# EAGLE board Remote (EAGLE 5.11)
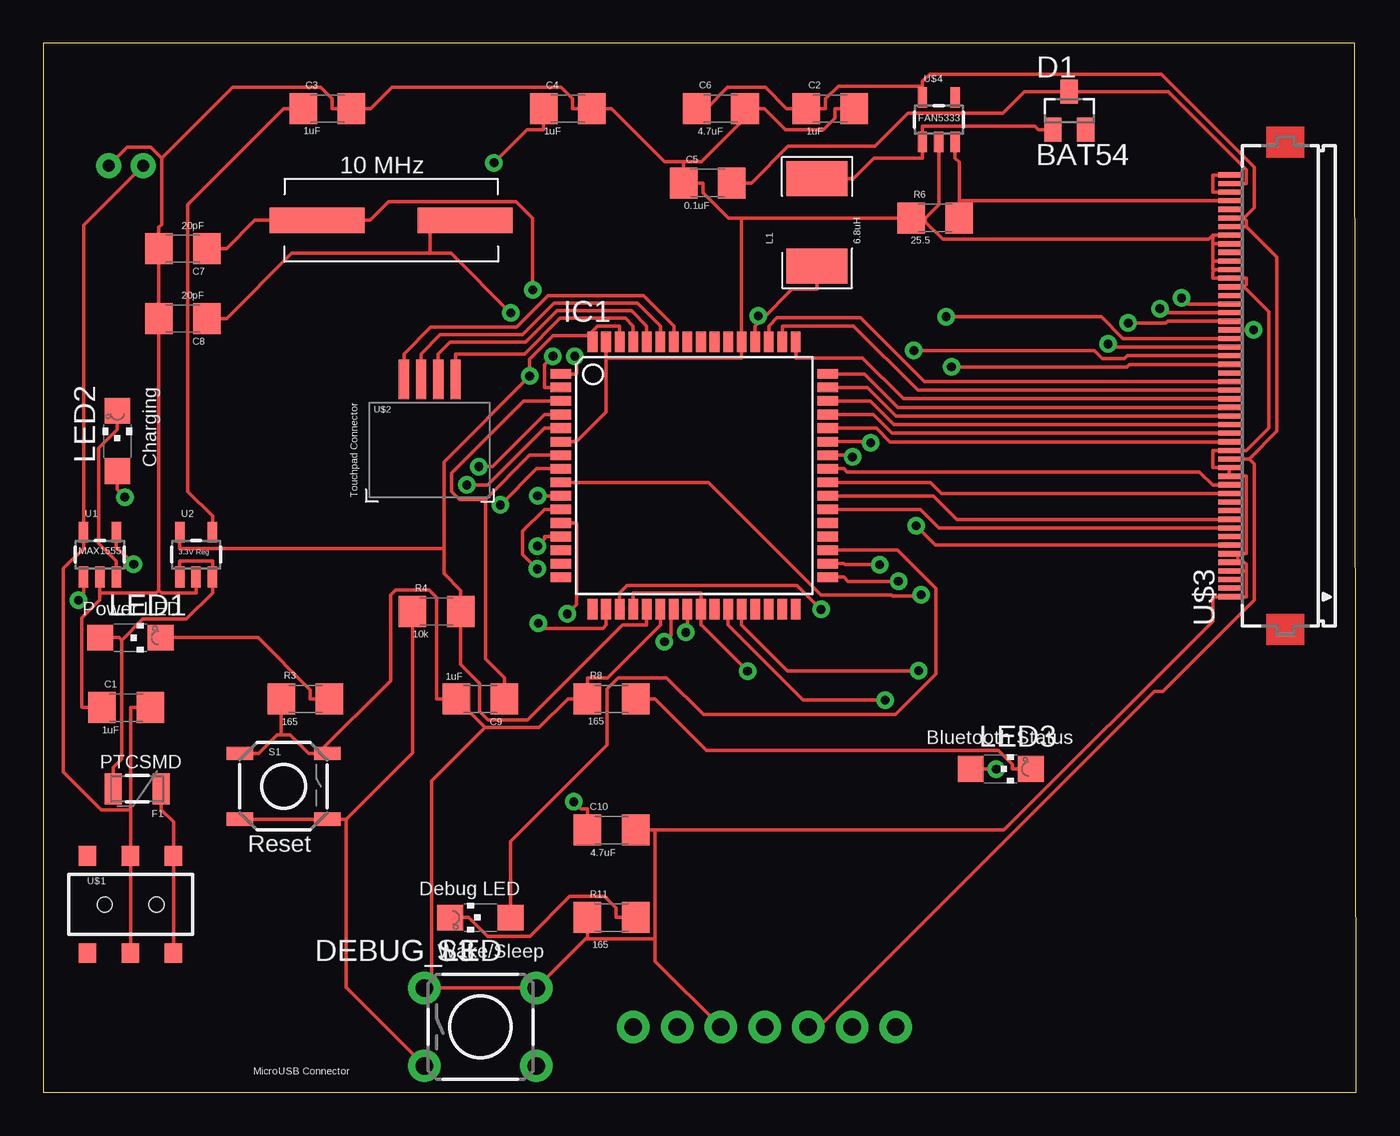
[diagram p0: board, top side]
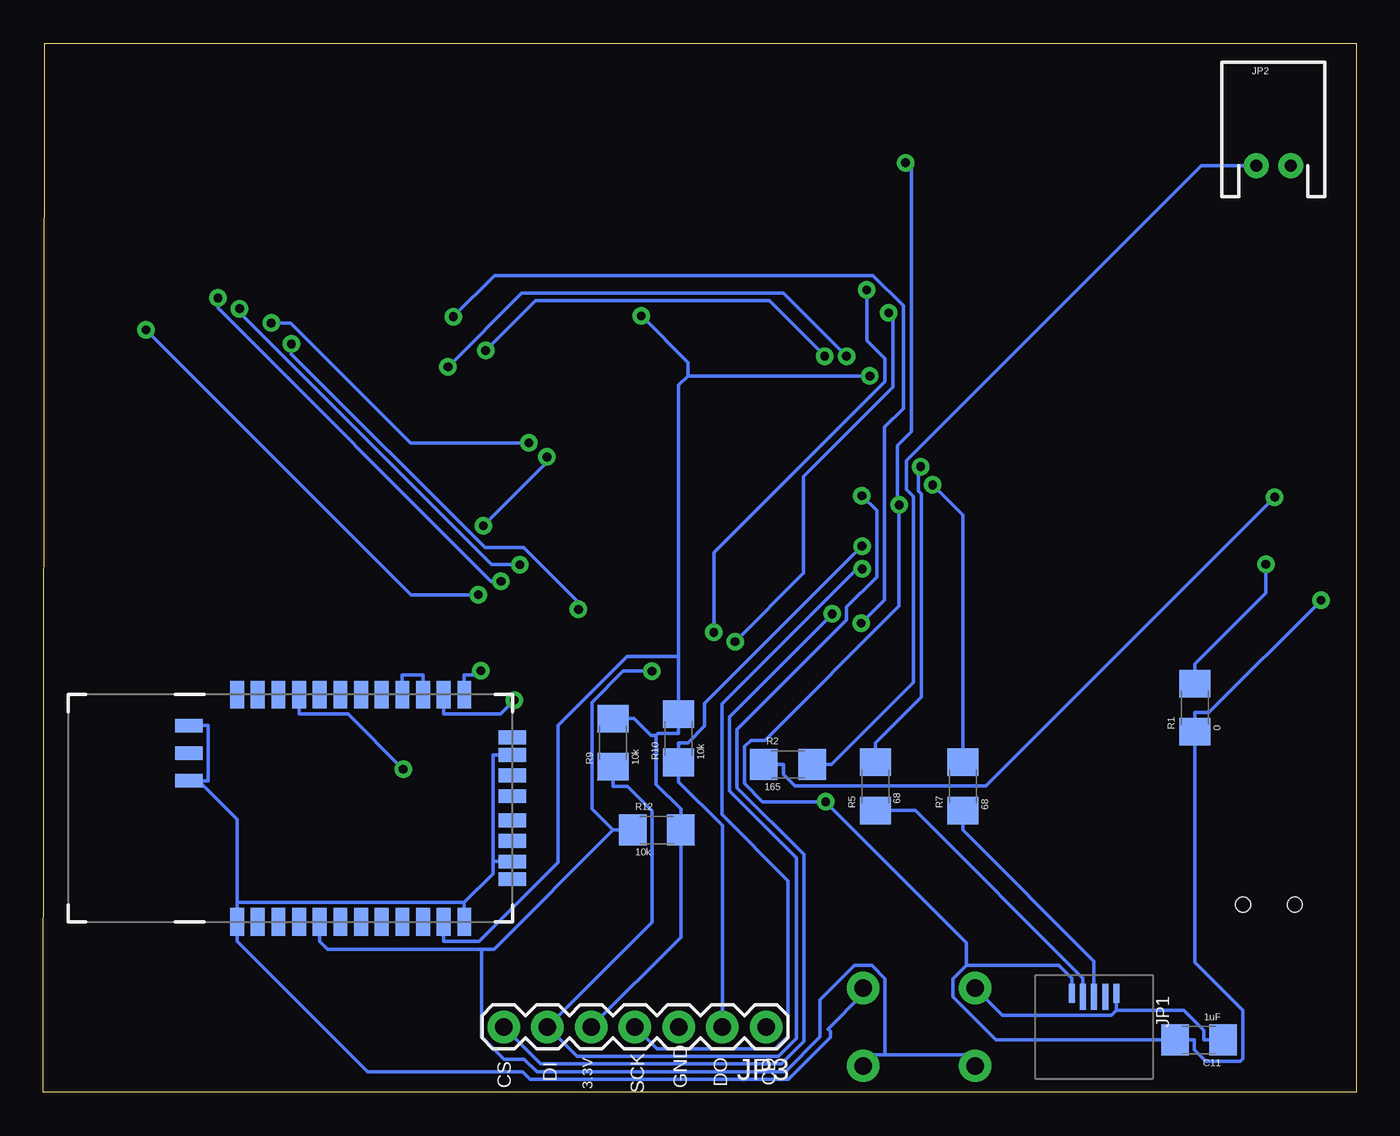
[diagram p1: board, bottom side, seen from below]

Size 76.29 x 60.96 mm. Coordinates in mm from the lower left corner, seen from the top.
Outline: 0,0 76.29,0 76.2,60.96 0,60.96 0,0
Copper layers (1*16): Top 0.035mm / dielectric 1.5mm / Bottom 0.035mm
Design rules "SparkFun": minimum track width 8mil, minimum drill 20mil, track to track 8mil, track to pad 8mil, pad to pad 8mil, via to via 8mil, smd to smd 8mil, copper to edge 10mil, drill to drill 8mil, minimum pad ring 12mil, minimum via ring 10mil, stop-mask expansion 4mil, vias tented up to drill 25mil, thermal gap 10mil

## Footprints (pad centres in the part's own frame; a part is rotated, then mirrored left to right if it is on the bottom)
1206 = smd 1.6 x 1.8: 1 -1.4,0; 2 1.4,0
SOT23 = smd 1 x 1.4: 1 -0.95,-1.1; 2 0.95,-1.1; 3 0,1.1
CHIPLED_1206 = smd 1.5 x 1.5: A 0,-1.75; C 0,1.75
PTC-1206 = smd 1 x 1.8: 1 -1.4,0; 2 1.4,0
TQFP64 = smd 1.194 x 0.559: 1 -7.76,5.905; 2 -7.76,5.118; 3 -7.76,4.331; 4 -7.76,3.543; 5 -7.76,2.756; 6 -7.76,1.968; 7 -7.76,1.181; 8 -7.76,0.394; 9 -7.76,-0.394; 10 -7.76,-1.181; 11 -7.76,-1.968; 12 -7.76,-2.756; 13 -7.76,-3.543; 14 -7.76,-4.331; 15 -7.76,-5.118; 16 -7.76,-5.905; 33 7.76,-5.905; 34 7.76,-5.118; 35 7.76,-4.331; 36 7.76,-3.543; 37 7.76,-2.756; 38 7.76,-1.968; 39 7.76,-1.181; 40 7.76,-0.394; 41 7.76,0.394; 42 7.76,1.181; 43 7.76,1.968; 44 7.76,2.756; 45 7.76,3.543; 46 7.76,4.331; 47 7.76,5.118; 48 7.76,5.905 | smd 0.559 x 1.194: 17 -5.905,-7.76; 18 -5.118,-7.76; 19 -4.331,-7.76; 20 -3.543,-7.76; 21 -2.756,-7.76; 22 -1.968,-7.76; 23 -1.181,-7.76; 24 -0.394,-7.76; 25 0.394,-7.76; 26 1.181,-7.76; 27 1.968,-7.76; 28 2.756,-7.76; 29 3.543,-7.76; 30 4.331,-7.76; 31 5.118,-7.76; 32 5.905,-7.76; 49 5.905,7.76; 50 5.118,7.76; 51 4.331,7.76; 52 3.543,7.76; 53 2.756,7.76; 54 1.968,7.76; 55 1.181,7.76; 56 0.394,7.76; 57 -0.394,7.76; 58 -1.181,7.76; 59 -1.968,7.76; 60 -2.756,7.76; 61 -3.543,7.76; 62 -4.331,7.76; 63 -5.118,7.76; 64 -5.905,7.76
MICRO-B-RA-SMT = smd 0.35 x 1.1: 1 1.3,-1.95; 5 -1.3,-1.95 | smd 0.35 x 1.5: 2 0.65,-1.75; 3 0,-1.75; 4 -0.65,-1.75
JST-2-PTH = drill 0.7 pad 1.448 round: 1 -1,0; 2 1,0
1X07 = drill 1.016 pad 1.88 round: 1 0,0; 2 2.54,0; 3 5.08,0; 4 7.62,0; 5 10.16,0; 6 12.7,0; 7 15.24,0
INDUCTOR-1206 = smd 2.032 x 3.556: P$1 -2.54,0; P$2 2.54,0
CRYSTAL-SMD-10.5X4.8-2PIN = smd 5.5 x 1.5: P$1 -4.3,0; P$2 4.3,0
TACTILE_SWITCH_SMD = smd 1.524 x 0.762: 1 -2.54,1.905; 2 2.54,1.905; 3 -2.54,-1.905; 4 2.54,-1.905
TACTILE-PTH = drill 1.016 pad 1.88 round: 1 -3.251,2.261; 2 3.251,2.261; 3 -3.251,-2.261; 4 3.251,-2.261
SOT23-5 = smd 0.55 x 1.2: 1 -0.95,-1.3; 2 0,-1.3; 3 0.95,-1.3; 4 0.95,1.3; 5 -0.95,1.3
AYZ0202 = smd 1 x 1.15: 1 -2.5,2.825; 2 0,2.825; 3 2.5,2.825; 4 -2.5,-2.825; 5 0,-2.825; 6 2.5,-2.825 | hole 0.85: 1.5,0; -1.5,0
PSP_TOUCH_CONNECTOR = smd 0.6 x 2.3: X1 1.5,2.85; X2 -0.5,2.85; Y1 -1.5,2.85; Y2 0.5,2.85
GRAPHIC_LCD = smd 0.3 x 1.3: 1 -12.25,3.25; 2 -11.75,3.25; 3 -11.25,3.25; 4 -10.75,3.25; 5 -10.25,3.25; 6 -9.75,3.25; 7 -9.25,3.25; 8 -8.75,3.25; 9 -8.25,3.25; 10 -7.75,3.25; 11 -7.25,3.25; 12 -6.75,3.25; 13 -6.25,3.25; 14 -5.75,3.25; 15 -5.25,3.25; 16 -4.75,3.25; 17 -4.25,3.25; 18 -3.75,3.25; 19 -3.25,3.25; 20 -2.75,3.25; 21 -2.25,3.25; 22 -1.75,3.25; 23 -1.25,3.25; 24 -0.75,3.25; 25 -0.25,3.25; 26 0.25,3.25; 27 0.75,3.25; 28 1.25,3.25; 29 1.75,3.25; 30 2.25,3.25; 31 2.75,3.25; 32 3.25,3.25; 33 3.75,3.25; 34 4.25,3.25; 35 4.75,3.25; 36 5.25,3.25; 37 5.75,3.25; 38 6.25,3.25; 39 6.75,3.25; 40 7.25,3.25; 41 7.75,3.25; 42 8.25,3.25; 43 8.75,3.25; 44 9.25,3.25; 45 9.75,3.25; 46 10.25,3.25; 47 10.75,3.25; 48 11.25,3.25; 49 11.75,3.25; 50 12.25,3.25
SOT-23-5 = smd 0.55 x 1.2: 1 -0.95,-1.3; 2 0,-1.3; 3 0.95,-1.3; 4 0.95,1.3; 5 -0.95,1.3
RN41 = smd 0.8 x 1.6: 1 -6.6,-6.6; 2 -5.4,-6.6; 3 -4.2,-6.6; 4 -3,-6.6; 5 -1.8,-6.6; 6 -0.6,-6.6; 7 0.6,-6.6; 8 1.8,-6.6; 9 3,-6.6; 10 4.2,-6.6; 11 5.4,-6.6; 12 6.6,-6.6; 13 6.6,6.6; 14 5.4,6.6; 15 4.2,6.6; 16 3,6.6; 17 1.8,6.6; 18 0.6,6.6; 19 -0.6,6.6; 20 -1.8,6.6; 21 -3,6.6; 22 -4.2,6.6; 23 -5.4,6.6; 24 -6.6,6.6 | smd 1.6 x 0.8: 25 -9.4,4.8; 26 -9.4,3.2; 27 -9.4,1.6; 28 9.4,3.1; 29 9.4,-3.1; 30 9.4,-4.122; 31 9.4,-1.9; 32 9.4,-0.7; 33 9.4,0.7; 34 9.4,1.9; 35 9.4,4.122

## Placement (x,y rotation side)
C1  1uF  [1206]  4.83,22.35 0 top
C2  1uF  [1206]  45.72,57.15 0 top
C3  1uF  [1206]  16.51,57.15 0 top
C4  1uF  [1206]  30.48,57.15 0 top
C5  0.1uF  [1206]  38.61,52.83 0 top
C6  4.7uF  [1206]  39.37,57.15 0 top
C7  20pF  [1206]  8.13,49.02 180 top
C8  20pF  [1206]  8.13,44.96 180 top
C9  1uF  [1206]  25.4,22.86 180 top
C10  4.7uF  [1206]  33.02,15.24 0 top
C11  1uF  [1206]  9.14,3.05 180 bottom
D1  BAT54  [SOT23]  59.6,57.03 0 top
DEBUG_LED  [CHIPLED_1206]  25.4,10.16 90 top
F1  PTCSMD  [PTC-1206]  5.47,17.65 180 top
IC1  [TQFP64]  37.82,35.84 0 top
JP1  Micro_USB  [MICRO-B-RA-SMT]  15.24,3.81 180 bottom
JP2  3V  [JST-2-PTH]  4.83,53.85 0 bottom
JP3  [1X07]  34.29,3.81 180 bottom
L1  6.8uH  [INDUCTOR-1206]  44.96,50.55 90 top
LED1  [CHIPLED_1206]  5.08,26.42 270 top
LED2  Amber  [CHIPLED_1206]  4.32,37.85 0 top
LED3  [CHIPLED_1206]  55.63,18.8 270 top
Q1  10MHz  [CRYSTAL-SMD-10.5X4.8-2PIN]  20.22,50.66 180 top
R1  0  [1206]  9.4,22.35 90 bottom
R2  165  [1206]  33.02,19.05 0 bottom
R3  165  [1206]  15.24,22.86 0 top
R4  10k  [1206]  22.86,27.94 0 top
R5  68  [1206]  27.94,17.78 90 bottom
R6  25.5  [1206]  51.82,50.8 0 top
R7  68  [1206]  22.86,17.78 90 bottom
R8  165  [1206]  33.02,22.86 0 top
R9  10k  [1206]  43.18,20.32 90 bottom
R10  10k  [1206]  39.37,20.57 90 bottom
R11  165  [1206]  33.02,10.16 0 top
R12  10k  [1206]  40.64,15.24 0 bottom
S1  [TACTILE_SWITCH_SMD]  13.97,17.78 0 top
S3  [TACTILE-PTH]  25.4,3.81 0 top
U1  MAX1555  [SOT23-5]  3.3,31.24 0 top
U2  V_REG_LDOSMD  [SOT23-5]  8.89,31.24 0 top
U$1  AYZ0202  [AYZ0202]  5.08,10.92 0 top
U$2  PSP_TOUCH_CONNECTOR  [PSP_TOUCH_CONNECTOR]  22.46,38.57 0 top
U$3  CFAF320240F-035T  [GRAPHIC_LCD]  72.16,41.05 90 top
U$4  FAN5333  [SOT-23-5]  52.03,56.51 0 top
U$5  BLUETOOTH-RN41"  [RN41]  58.42,16.51 0 bottom

## Library data of the parts
C1-C11 F1 JP1-JP3 L1 Q1 R1-R12 S1 S3 U1 U2 U$1 U$2 U$5 = SparkFun
D1 = diode
DEBUG_LED LED1-LED3 = led
IC1 = controller-micro_atmel_jd
U$3 = CSW
U$4 = fairchild-semic

## Nets
3.3V: C2.1 C6.1 IC1.21 IC1.52 IC1.62 IC1.64 JP3.5 L1.P$1 R4.2 R9.2 R10.2 R12.2 U2.5 U$3.17 U$3.44 U$3.45 U$4.5 U$5.11
CD: JP3.1
CS: IC1.10 JP3.7
CS_LCD: IC1.39 U$3.10
D+: JP1.3 R7.1
D-: JP1.2 R5.1
DB1: IC1.33 U$3.35
DB2: IC1.34 U$3.34
DB3: IC1.43 U$3.33
DB4: IC1.9 U$3.32
DB5: IC1.18 U$3.31
DB6: IC1.19 U$3.30
DB7: IC1.1 U$3.29
DB8: IC1.2 U$3.28
DB10: IC1.51 U$3.26
DB11: IC1.50 U$3.25
DB12: IC1.49 U$3.24
DB13: IC1.48 U$3.23
DB14: IC1.47 U$3.22
DB15: IC1.46 U$3.21
DB16: IC1.45 U$3.20
DB17: IC1.44 U$3.19
DI: IC1.12 JP3.6 R9.1
DO: IC1.13 JP3.2 R10.1
EN_BCKLGHT: U$4.4
GND: C1.1 C2.2 C3.2 C4.2 C5.1 C6.2 C7.2 C8.2 C9.2 C10.2 C11.1 IC1.6 IC1.22 IC1.53 IC1.63 JP1.5 JP2.2 JP3.3 R3.1 R6.1 R8.1 R11.1 S1.1 S1.2 S3.1 S3.2 U1.2 U2.2 U$3.1 U$3.4 U$3.5 U$3.6 U$3.15 U$3.16 U$3.18 U$3.37 U$3.38 U$3.39 U$3.40 U$3.42 U$3.43 U$4.2 U$5.1 U$5.12 U$5.25 U$5.27 U$5.28 U$5.29
LCDRST: IC1.38 U$3.9
N$1: C7.1 IC1.24 Q1.P$2
N$2: C8.1 IC1.23 Q1.P$1
N$3: F1.1 U$1.3 U$1.6
N$4: F1.2 LED1.A U2.1 U2.3
N$5: IC1.4 R5.2
N$6: IC1.5 R7.2
N$7: LED1.C R3.2
N$8: C3.1 U2.4
N$9: U$5.15 U$5.16
N$10: LED3.A U$5.21
N$11: LED3.C R8.2
N$12: LED2.A R2.1
N$13: DEBUG_LED.C R11.2
N$14: R1.2 U1.4
N$15: D1.1 L1.P$2 U$4.1
N$16: C5.2 D1.3 U$3.49
N$17: U$3.48 U$3.50
N$18: R6.2 U$3.47 U$4.3
N$19: LED2.C U1.3
N$20: DEBUG_LED.A IC1.35
RD: IC1.42 U$3.7
RS: IC1.40 U$3.13
RST: IC1.20 IC1.25 R4.1 R12.1 S1.3 S1.4 S3.3 S3.4 U$5.5
RXD: IC1.27 U$5.14
SCK: IC1.11 JP3.4
TXD: IC1.28 U$5.13
UVCC: C9.1 IC1.3 IC1.7
VBATT: C1.2 JP2.1 R2.2 U1.5 U$1.2 U$1.5
VBUS: C4.1 C10.1 C11.2 IC1.8 JP1.1 R1.1 U1.1
WR: IC1.41 U$3.14
X1: IC1.61 U$2.X1
X2: IC1.59 U$2.X2
Y1: IC1.58 U$2.Y1
Y2: IC1.60 U$2.Y2

## Tracks (layer width: path | path; a pad name or v marks a point on that pad's centre or on a via)
3.3V  (via drill 0.51 pad 1.02)
  Top 0.203: JP3.5 45.06,3.81 64.54,23.29 65.03,23.29 70.35,28.6 70.35,36.5 70.05,36.8 | 51.08,58.45 46.19,58.45 45.45,57.72 45.45,57.15 C2.1 43.19,57.15 41.96,58.38 39.77,58.38 38.53,57.15 C6.1 | 51.08,58.45 51.08,58.74 51.5,59.16 64.94,59.16 70.35,53.75 70.35,51.4 69.75,50.8 | 51.08,58.45 U$4.5 | 69.75,50.8 69.89,50.66 69.89,50.3 | 69.75,50.8 69.4,50.8 U$3.45 | 70.05,36.8 69.89,36.8 U$3.17 | 70.05,36.8 71.66,38.41 71.66,48.52 69.89,50.3 | 69.89,50.3 U$3.44 | L1.P$1 44.96,46.66 43.5,46.66 41.75,44.91 | 41.75,44.91 41.37,44.52 IC1.52 | v41.54,45.12 41.75,44.91 | IC1.21 35.07,27.15 33.67,27.15 28.15,21.63 25.86,21.63 25.35,22.14 25.35,23.77 24.26,24.85 R4.2 24.26,28.55 24.26,29.17 23.28,30.15 23.28,31.61 | 23.28,31.61 23.28,36.63 v28.27,41.62 28.27,42.6 29.62,43.96 31.92,43.96 | 23.28,31.61 7.94,31.61 U2.5 | 31.92,43.96 31.92,44.24 32.2,44.52 33.49,44.52 IC1.62 | 31.92,43.96 IC1.64
  Bottom 0.203: 39.37,25.34 39.37,23.1 R10.2 39.37,20.84 40.58,20.84 40.67,20.75 | 38.83,41.62 39.37,41.08 39.37,25.34 | 39.37,25.34 42.37,25.34 46.37,21.33 46.37,13.36 50.95,8.78 53.02,8.78 U$5.11 | JP3.5 39.24,9.02 R12.2 39.24,16.47 40.67,17.9 40.67,20.75 | 40.67,20.75 40.98,20.75 41.95,21.72 R9.2 | v41.54,45.12 38.83,42.41 38.83,41.62 | v28.27,41.62 38.83,41.62
CS  (via drill 0.51 pad 1.02)
  Top 0.203: v28.73,34.66 IC1.10
  Bottom 0.203: JP3.7 47.38,1.66 33.41,1.66 32.1,2.97 32.1,13.82 35.98,17.7 35.98,21.08 29.61,27.45 29.61,28.21 27.87,29.95 27.87,33.8 v28.73,34.66
CS_LCD
  Top 0.203: U$3.10 53.07,33.3 51.71,34.66 IC1.39
D+
  Bottom 0.203: R7.1 22.86,15.25 15.24,7.63 JP1.3
D-
  Bottom 0.203: JP1.2 15.89,6.64 25.63,16.38 R5.1
DB1  (via drill 0.51 pad 1.02)
  Top 0.203: U$3.35 66.48,45.8 v66.13,46.15 | IC1.33 46.51,29.93 46.75,29.69 v49.69,29.69
  Bottom 0.203: v49.69,29.69 50.26,29.69 66.13,45.55 v66.13,46.15
DB2  (via drill 0.51 pad 1.02)
  Top 0.203: U$3.34 65.11,45.3 v64.87,45.53 | IC1.34 46.51,30.72 46.57,30.66 v48.6,30.66
  Bottom 0.203: v64.87,45.53 64.87,45.29 50.24,30.66 v48.6,30.66
DB3  (via drill 0.51 pad 1.02)
  Top 0.203: U$3.33 65.32,44.8 65.22,44.7 v63.03,44.7 | v48.08,37.74 48.01,37.81 46.51,37.81 IC1.43
  Bottom 0.203: v48.08,37.74 54.95,37.74 61.9,44.7 v63.03,44.7
DB4  (via drill 0.51 pad 1.02)
  Top 0.203: v70.3,44.3 69.89,44.3 U$3.32 | IC1.9 38.66,35.44 45.2,28.91 49.29,28.91 49.34,28.85 50.95,28.85 v51.01,28.91
  Bottom 0.203: v51.01,28.91 54.91,28.91 v70.3,44.3
DB5  (via drill 0.51 pad 1.02)
  Top 0.203: U$3.31 62.73,43.8 61.46,45.07 v52.46,45.07 | v28.77,27.25 29.06,26.96 32.51,26.96 32.7,27.15 IC1.18
  Bottom 0.203: v28.77,27.25 27.4,28.62 27.4,38.66 26.32,39.74 26.32,45.71 28.07,47.45 50.07,47.45 v52.46,45.07
DB6  (via drill 0.51 pad 1.02)
  Top 0.203: U$3.30 62.05,43.3 v61.87,43.47 | v45.19,28.06 43.8,29.44 33.93,29.44 33.49,29.01 IC1.19
  Bottom 0.203: v61.87,43.47 61.87,42.9 50.62,31.65 48.38,31.65 45.19,28.46 v45.19,28.06
DB7  (via drill 0.51 pad 1.02)
  Top 0.203: v50.58,43.1 61.06,43.1 61.54,42.62 62.81,42.62 62.99,42.8 67.93,42.8 U$3.29 | v30.88,42.77 30.99,42.67 30.99,41.74 IC1.1
  Bottom 0.203: v50.58,43.1 47.69,45.99 34.09,45.99 v30.88,42.77
DB8  (via drill 0.51 pad 1.02)
  Top 0.203: v52.77,42.15 62.95,42.15 63.1,42.3 U$3.28 | v29.62,42.77 29.14,42.29 29.14,40.96 IC1.2
  Bottom 0.203: v29.62,42.77 33.27,46.42 48.49,46.42 v52.77,42.15
DB10
  Top 0.203: IC1.51 42.15,44.52 42.63,45.01 47.49,45.01 51.2,41.3 U$3.26
DB11
  Top 0.203: IC1.50 42.94,44.52 47.07,44.52 50.8,40.8 U$3.25
DB12
  Top 0.203: IC1.49 43.73,42.67 47.6,42.67 49.97,40.3 U$3.24
DB13
  Top 0.203: IC1.48 47.7,41.74 49.65,39.8 U$3.23
DB14
  Top 0.203: IC1.47 47.88,40.96 49.53,39.3 U$3.22
DB15
  Top 0.203: U$3.21 49.42,38.8 48.05,40.17 46.51,40.17 IC1.46
DB16
  Top 0.203: U$3.20 49.31,38.3 48.23,39.38 46.51,39.38 IC1.45
DB17
  Top 0.203: U$3.19 49.2,37.8 48.41,38.59 46.51,38.59 IC1.44
DI  (via drill 0.51 pad 1.02)
  Top 0.203: IC1.12 30.99,33.08 30.99,28.34 v30.45,27.8
  Bottom 0.203: R9.1 43.18,17.79 42.33,17.79 40.91,16.37 40.91,9.89 JP3.6 45.27,2.09 33.58,2.09 32.53,3.15 32.53,13.63 36.43,17.52 36.43,21.82 v30.45,27.8
DO  (via drill 0.51 pad 1.02)
  Top 0.203: v28.72,31.74 29.14,32.15 29.14,32.3 IC1.13
  Bottom 0.203: v28.72,31.74 37.86,22.6 37.86,21.28 38.84,20.3 39.37,20.3 R10.1 39.37,19.08 39.37,18.04 36.83,15.5 JP3.2
GND
  Top 0.203: 69.89,30.3 69.89,28.8 U$3.1 67.93,28.8 67.93,27.37 55.8,15.24 35.55,15.24 | 69.89,30.3 69.89,30.69 69.78,30.8 69.4,30.8 | 51.26,50.8 52.03,51.56 U$4.2 | 51.26,50.8 51.26,50.57 52.26,49.57 67.7,49.57 67.93,49.8 | 31.62,8.93 31.51,8.93 S3.2 22.57,6.07 | 31.62,8.93 R11.1 | 31.62,8.93 35.55,8.93 | 3.3,29.01 6.58,29.01 6.73,29.16 | 3.3,29.01 3.3,28.62 2.25,27.57 2.25,22.4 2.3,22.35 C1.1 | 3.3,29.01 U1.2 | 6.73,29.16 6.73,43.73 C8.2 C7.2 6.73,50.25 6.89,50.42 6.89,54.27 | 6.73,29.16 6.88,29.01 8.89,29.01 U2.2 | 51.26,50.8 50.7,50.8 R6.1 40.58,50.8 | 69.4,30.8 U$3.5 | 69.4,31.3 69.89,31.3 69.89,35.8 U$3.15 U$3.16 67.93,36.3 67.93,37.3 U$3.18 69.89,37.3 71.19,38.59 71.19,45.36 69.75,46.8 | 69.4,31.3 U$3.6 | 69.4,30.8 69.4,31.3 | JP3.3 35.55,7.63 35.55,8.93 | 35.55,8.93 35.55,15.24 | 35.55,15.24 C10.2 | 41.34,57.15 38.25,54.06 37.21,54.06 | 37.21,54.06 C5.1 38.34,52.83 38.34,52.27 39.8,50.8 40.58,50.8 | 37.21,54.06 36.1,54.06 33.01,57.15 C4.2 30.75,57.15 30.75,57.72 30.08,58.38 20.27,58.38 19.04,57.15 C3.2 16.78,57.15 16.78,57.72 16.11,58.38 11,58.38 6.89,54.27 | 68.08,47.8 67.93,47.65 67.93,47.3 U$3.38 69.89,47.3 69.89,46.94 69.75,46.8 | 68.08,47.8 68.19,47.8 U$3.39 | 68.08,47.8 67.93,47.8 67.93,48.3 | 67.93,48.3 67.93,49.3 | 67.93,48.3 U$3.40 | 67.93,49.3 67.93,49.8 | 67.93,49.3 68.04,49.3 U$3.42 | 40.58,50.8 IC1.53 40.58,42.67 32.7,42.67 | 41.34,57.15 41.9,57.15 43.13,55.92 45.32,55.92 45.99,56.59 45.99,57.15 C2.2 | 41.34,57.15 C6.2 | 15.96,19.68 20.18,23.9 20.18,28.9 20.47,29.19 22.42,29.19 22.87,28.74 22.87,22.86 C9.2 25.67,21.19 | 15.96,19.68 15.42,19.68 14.34,20.76 13.84,20.76 | 15.96,19.68 S1.2
  Top 0.203: 22.57,6.07 22.57,18.09 25.67,21.19 | S3.1 22.57,6.07 | 25.67,21.19 28.82,21.19 30.49,22.86 R8.1 31.62,24.09 32.79,24.09 35.85,27.15 IC1.22 | IC1.6 30.99,37.81 32.7,39.52 32.7,42.67 | 32.7,42.67 IC1.63 | 13.84,20.76 13.6,20.76 12.52,19.68 S1.1 | 13.84,20.76 13.84,21.63 R3.1 | 6.89,54.27 6.26,54.9 4.88,54.9 JP2.2 | 69.89,30.3 U$3.4 | 69.75,46.8 69.4,46.8 U$3.37 | 67.93,49.8 U$3.43
  Bottom 0.203: U$5.28 50.15,19.61 50.15,13.41 | 50.15,13.41 U$5.29 | 50.15,13.41 50.15,12.71 51.82,11.04 | 65.02,11.04 51.82,11.04 | 51.82,11.04 U$5.12 | 67.25,18.11 65.02,15.88 65.02,11.04 | 13.94,4.77 JP1.5 | S3.1 20.56,4.48 14.23,4.48 13.94,4.77 | 13.94,4.77 10.03,4.77 8.87,3.61 8.87,3.05 C11.1 | S3.2 28.65,5.72 30.69,3.68 30.57,3.56 30.57,3.2 32.74,1.03 | 32.74,1.03 | 32.74,1.03 32.99,0.77 48,0.77 48.43,1.21 57.45,1.21 65.02,8.78 U$5.1 65.02,10.47 65.02,11.04 | 67.25,18.11 66.69,18.11 66.69,21.31 U$5.25 | 67.25,18.11 U$5.27
LCDRST
  Top 0.203: U$3.9 52.02,32.8 50.95,33.87 IC1.38
N$1  (via drill 0.51 pad 1.02)
  Top 0.203: IC1.24 37.43,26.82 v37.33,26.73 | v28.45,46.61 28.45,50.78 27.48,51.74 20.08,51.74 19,50.66 Q1.P$2 12.29,50.66 10.66,49.02 C7.1
  Bottom 0.203: v37.33,26.73 37.33,31.37 27.4,41.3 27.4,42.63 28.45,43.67 v28.45,46.61
N$2  (via drill 0.51 pad 1.02)
  Top 0.203: IC1.23 36.46,27.9 36.46,26.55 v36.09,26.18 | 22.48,48.74 14.44,48.74 10.66,44.96 C8.1 | v27.16,45.29 23.71,48.74 22.48,48.74 | 22.48,48.74 22.48,50.66 Q1.P$1
  Bottom 0.203: v27.16,45.29 26.93,45.05 26.93,40.97 32.11,35.79 32.11,30.17 v36.09,26.18
N$3
  Top 0.203: F1.1 6.87,16.42 7.58,15.7 U$1.3 U$1.6
N$4
  Top 0.203: U2.1 7.94,30.87 9.84,30.87 U2.3 9.84,29.8 9.84,29.01 8.32,27.5 5.78,27.5 4.56,26.27 | 4.56,26.27 4.56,19.36 4.07,18.88 F1.2 | 4.56,26.27 4.41,26.42 4.38,26.42 LED1.A
N$5  (via drill 0.51 pad 1.02)
  Top 0.203: v25.31,36.35 26.11,36.35 29.14,39.38 IC1.4
  Bottom 0.203: v25.31,36.35 25.45,36.21 25.45,34.95 25.26,34.76 25.26,22.99 27.94,20.31 R5.2
N$6  (via drill 0.51 pad 1.02)
  Top 0.203: v24.61,35.29 25.83,35.29 29.14,38.59 IC1.5
  Bottom 0.203: v24.61,35.29 22.86,33.54 22.86,20.31 R7.2
N$7
  Top 0.203: LED1.C 12.48,26.42 15.51,23.39 15.51,22.86 R3.2
N$8
  Top 0.203: C3.1 13.98,57.15 8.4,51.57 8.4,34.91 9.84,33.47 U2.4
N$9
  Bottom 0.203: U$5.15 54.22,24.24 55.42,24.24 U$5.16
N$10  (via drill 0.51 pad 1.02)
  Top 0.203: LED3.A 54.96,18.8 54.97,18.78 v55.37,18.78
  Bottom 0.203: U$5.21 61.42,21.98 58.57,21.98 v55.37,18.78
N$11
  Top 0.203: LED3.C 56.3,18.8 56.3,19.07 55.49,19.88 38.53,19.88 35.55,22.86 R8.2
N$12  (via drill 0.51 pad 1.02)
  Top 0.203: v4.75,34.59 4.32,35.02 LED2.A
  Bottom 0.203: v4.75,34.59 21.54,17.8 32.6,17.8 33.29,18.48 33.29,19.05 R2.1
N$13
  Top 0.203: DEBUG_LED.C 24.73,10.16 25.81,9.08 28.28,9.08 30.59,11.39 32.62,11.39 33.29,10.72 33.29,10.16 R11.2
N$14  (via drill 0.51 pad 1.02)
  Top 0.203: v5.26,30.69 4.34,31.61 4.25,31.61 U1.4
  Bottom 0.203: v5.26,30.69 5.26,29.02 9.4,24.88 R1.2
N$15
  Top 0.203: D1.1 57.82,55.93 57.62,56.14 51.08,56.14 U$4.1 51.08,54.74 51.08,54.28 48.26,54.28 47.07,53.09 L1.P$2
N$16
  Top 0.203: C5.2 41.14,52.83 43.27,54.96 48.33,54.96 50.25,56.88 55.74,56.88 57,58.13 D1.3 65.35,58.13 69.89,53.59 69.89,52.8 U$3.49
N$17
  Top 0.203: U$3.48 67.93,52.3 67.93,53.3 U$3.50
N$18
  Top 0.203: U$4.3 52.98,54.28 53.22,54.04 53.22,51.8 | U$3.47 67.93,51.8 53.22,51.8 | R6.2 53.22,51.8
N$19
  Top 0.203: LED2.C 4.32,38.52 3.24,37.44 3.24,31.89 4.25,30.87 U1.3
N$20
  Top 0.203: DEBUG_LED.A 27.15,14.59 32.75,20.19 32.75,23.43 33.41,24.09 36.23,24.09 38.36,21.95 49.51,21.95 51.87,24.32 51.87,29.27 49.63,31.51 IC1.35
RD  (via drill 0.51 pad 1.02)
  Top 0.203: U$3.7 51.84,31.8 v50.71,32.92 | IC1.42 46.51,37.02 46.62,36.91 v47.01,36.91
  Bottom 0.203: v47.01,36.91 47.01,36.62 v50.71,32.92
RS
  Top 0.203: U$3.13 52.18,34.8 51.53,35.44 IC1.40
RST  (via drill 0.51 pad 1.02)
  Top 0.203: v40.92,24.47 38.24,27.15 38.22,27.15 IC1.25 38.22,29.01 34.28,29.01 IC1.20 | 17.6,15.88 21.46,19.73 R4.1 | S3.3 17.6,6.1 17.6,15.88 | S1.3 S1.4 17.6,15.88
  Bottom 0.203: 27.38,2.19 22.79,2.19 S3.3 | S3.4 28.02,2.19 27.38,2.19 | 27.38,2.19 27.38,6.6 28.16,7.38 29.15,7.38 31.15,5.38 31.15,3.23 33.17,1.21 47.61,1.21 48.34,1.94 49.5,1.94 50.81,3.24 50.81,8.32 | 50.81,8.32 50.09,8.32 43.17,15.24 | 50.81,8.32 59.76,8.32 60.22,8.78 U$5.5 | 43.17,15.24 44.41,16.48 44.41,22.66 42.59,24.47 v40.92,24.47 | 43.17,15.24 R12.1
RXD  (via drill 0.51 pad 1.02)
  Top 0.203: IC1.27 39.79,27.15 44.15,22.79 v48.91,22.79
  Bottom 0.203: U$5.14 53.02,21.98 49.73,21.98 v48.91,22.79
SCK  (via drill 0.51 pad 1.02)
  Top 0.203: v28.7,30.41 27.87,31.25 27.87,32.6 29.14,33.87 IC1.11
  Bottom 0.203: JP3.4 40.63,2.53 33.76,2.53 33.02,3.27 33.02,12.3 36.86,16.15 36.86,22.57 29.02,30.41 v28.7,30.41
TXD  (via drill 0.51 pad 1.02)
  Top 0.203: v50.86,24.5 43.23,24.5 40.58,27.15 IC1.28
  Bottom 0.203: v50.86,24.5 51.12,24.24 51.82,24.24 U$5.13
UVCC
  Top 0.203: 25.7,34.45 25.7,25.19 26.8,24.09 C9.1 | 25.7,34.45 28.27,37.02 29.14,37.02 IC1.7 | 25.7,34.45 24.2,34.45 23.74,34.91 23.74,35.99 27.91,40.17 IC1.3
VBATT
  Top 0.203: 5.08,16.41 3.38,16.41 1.18,18.61 1.18,30.44 2.35,31.61 U1.5 2.35,50.37 JP2.1 | 5.08,16.41 U$1.2 5.08,9 U$1.5 | 5.08,16.41 5.08,22.34 5.1,22.35 C1.2
  Bottom 0.203: JP2.1 9,53.85 26.15,36.7 26.15,35.03 25.73,34.61 25.73,23.81 30.49,19.05 R2.2
VBUS  (via drill 0.51 pad 1.02)
  Top 0.203: C4.1 29.08,55.92 28.11,55.92 v26.19,54 | v26.57,34.13 28.67,36.23 IC1.8 | U1.1 2.35,29.01 2.05,28.71 v2.05,28.59 | v30.83,16.88 31.25,16.47 31.62,16.47 C10.1
  Bottom 0.203: v26.19,54 25.84,53.65 25.84,38.4 26.66,37.58 26.66,34.22 v26.57,34.13 26.57,28.26 34.36,20.46 35.18,20.46 35.55,20.09 35.55,17.95 34.49,16.88 v30.83,16.88 22.65,8.7 22.65,7.39 | 22.65,7.39 23.43,6.61 23.43,5.55 20.93,3.05 11.67,3.05 C11.2 9.41,3.05 9.41,2.48 8.75,1.82 6.74,1.82 6.61,1.95 6.61,4.77 9.4,7.55 R1.1 9.4,21.52 9.4,22.08 8.56,22.08 v2.05,28.59 | 22.65,7.39 17.29,7.39 16.54,6.64 JP1.1
WR
  Top 0.203: IC1.41 46.51,36.23 46.69,36.05 67.17,36.05 67.93,35.3 U$3.14
X1
  Top 0.203: IC1.61 34.28,44.52 33.82,44.98 30.03,44.98 27.95,42.9 23.96,42.9 U$2.X1
X2
  Top 0.203: IC1.59 35.85,44.52 34.53,45.84 29.67,45.84 27.84,44.02 23.07,44.02 21.96,42.9 U$2.X2
Y1
  Top 0.203: IC1.58 36.64,44.52 34.88,46.28 29.34,46.28 27.51,44.45 22.5,44.45 20.96,42.9 U$2.Y1
Y2
  Top 0.203: IC1.60 35.07,44.52 34.18,45.41 29.85,45.41 28.02,43.58 23.64,43.58 22.96,42.9 U$2.Y2

## Text on the board
tPlace: 1uF | 1uF | 4.7uF | 1uF | FAN5333 | BAT54 | 10 MHz | 0.1uF | 20pF | 6.8uH | 25.5 | 20pF | Charging | Touchpad Connector | MAX1555 | 3.3V Reg | Power LED | 10k | 1uF | 1uF | 165 | 165 | Bluetooth Status | PTCSMD | Reset | 4.7uF | Debug LED | 165 | Wake/Sleep | MicroUSB Connector
bPlace: 0 | 10k | 10k | 165 | 68 | 68 | 10k | 1uF | CD | DO | SCK | 3.3V | DI | CS | GND